# Altium PCB TOF.pcbdoc
Units mil, origin at the board's own origin, x right, y up, seen from the top; angles counter-clockwise.
Board outline 10852.5 x 10852.5 mil, 2 copper layers (Top Layer, Bottom Layer); 2 components, 64 nets, 66 pads, 0 vias.
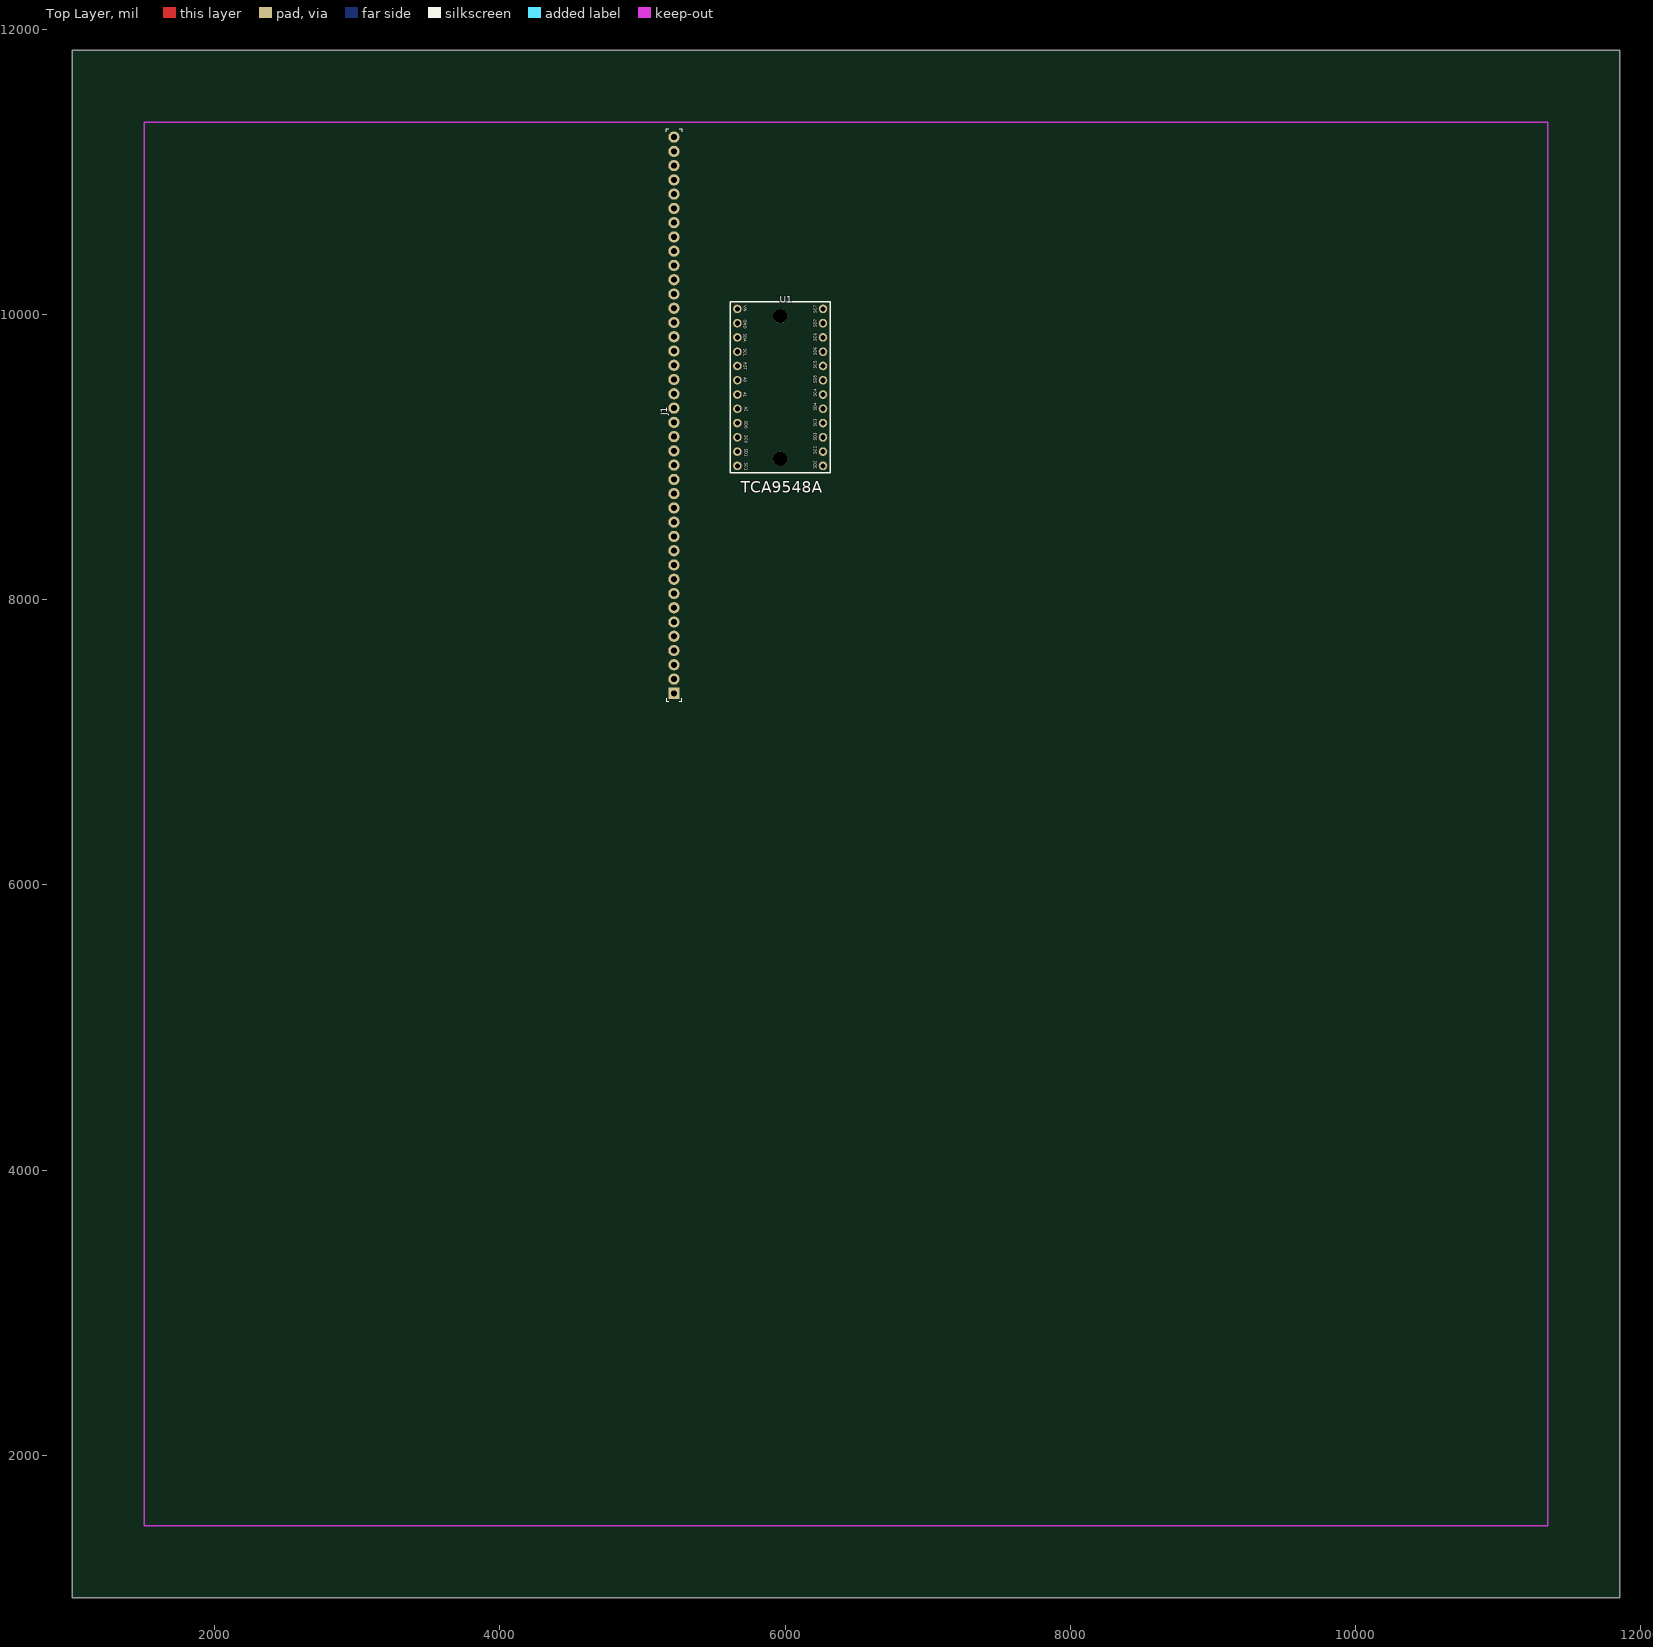
[diagram p0: Top Layer view]
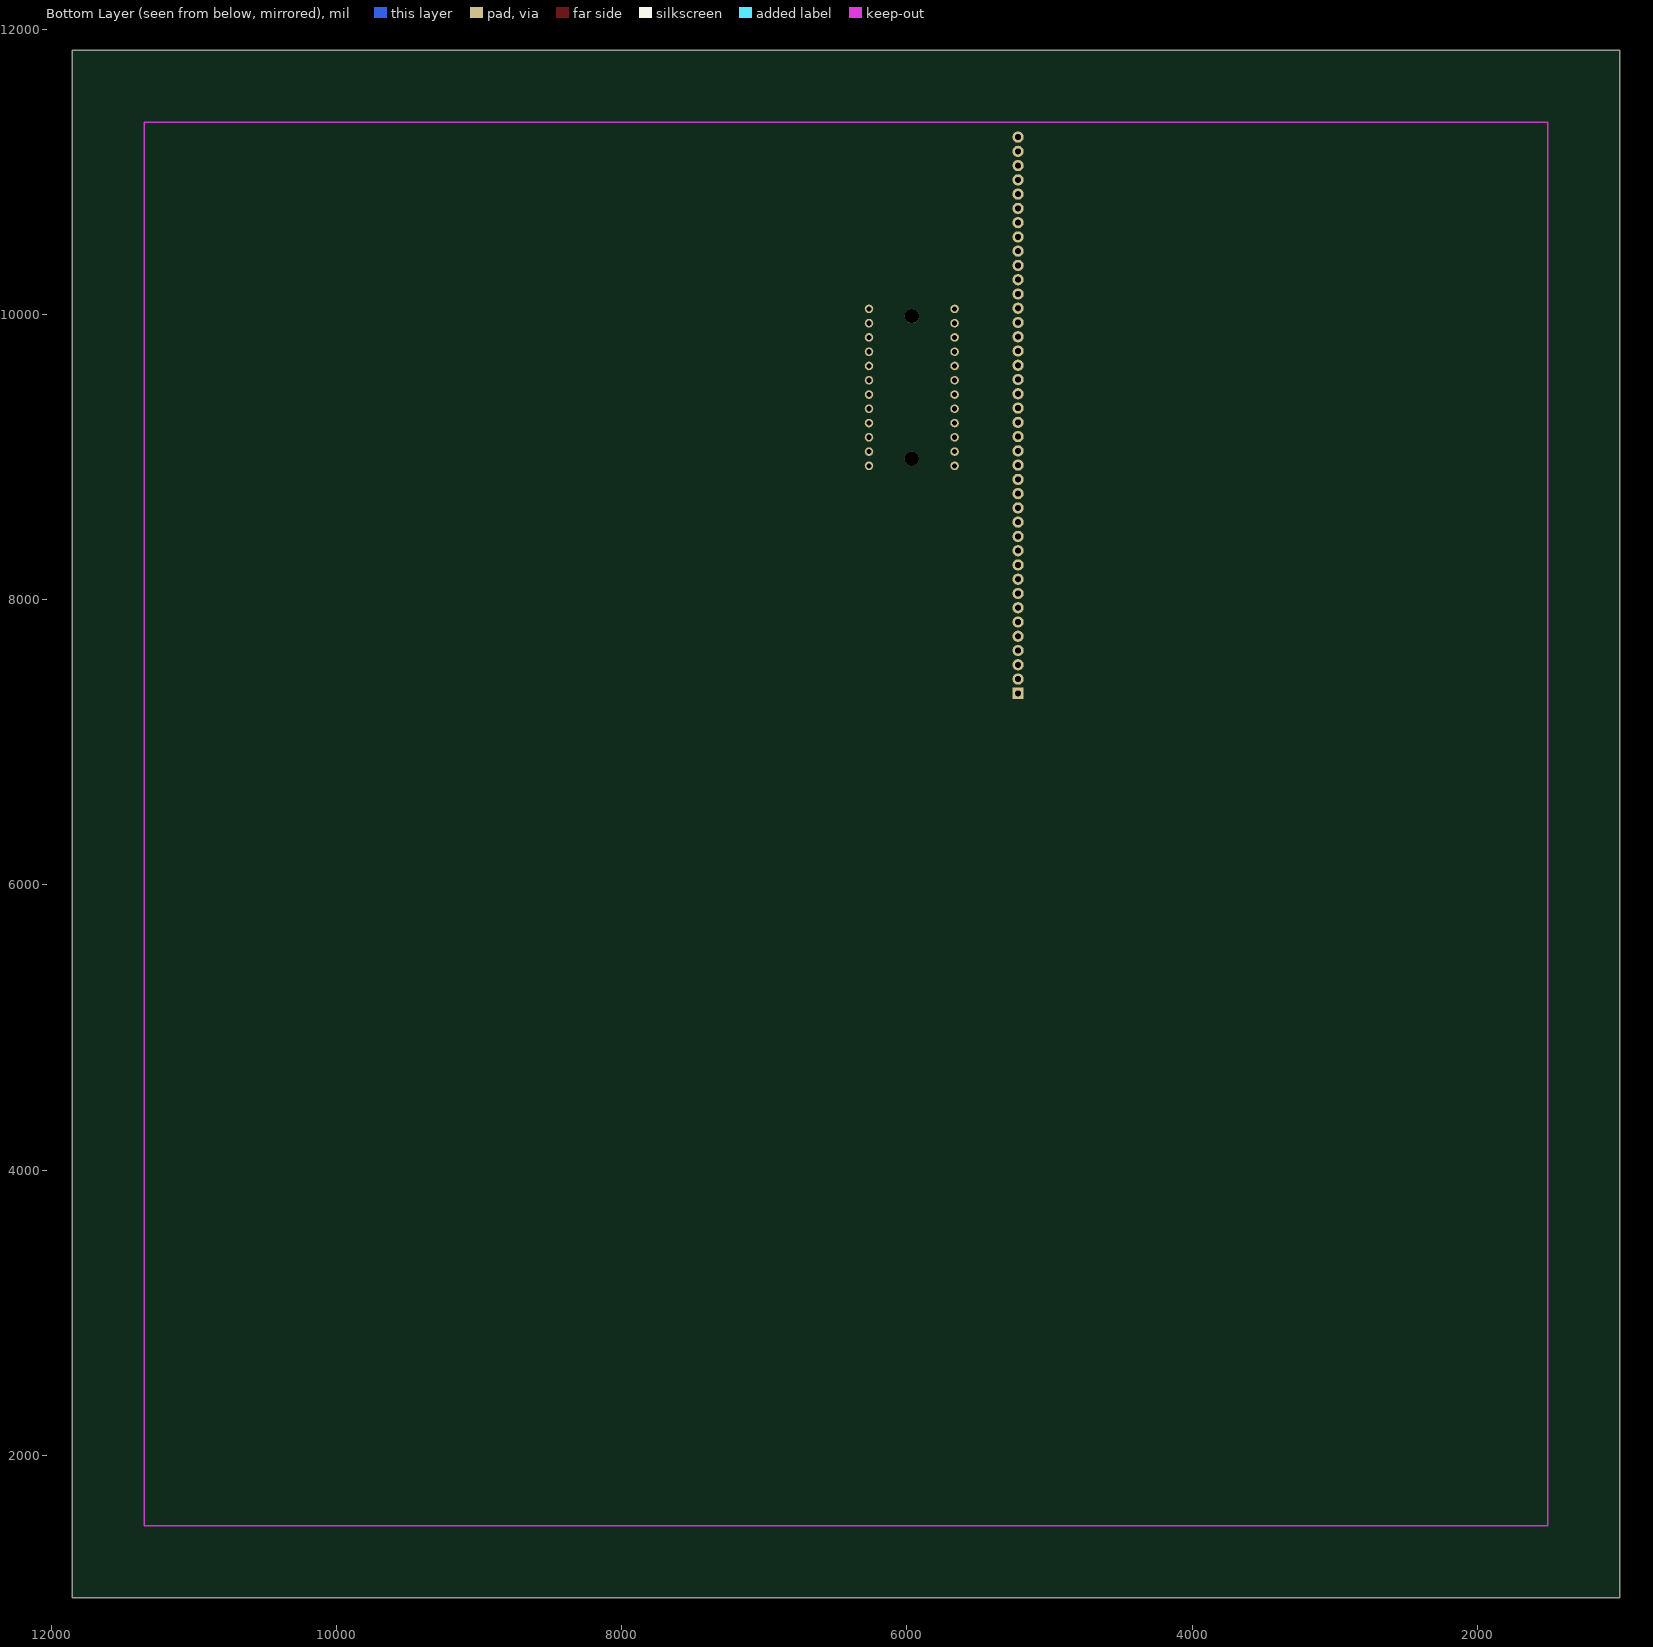
[diagram p1: Bottom Layer view, seen from below]

## Layer stack, top to bottom
Top Layer: signal copper (thickness not stored)
Dielectric: dielectric 12.6, FR-4, Dk 4.8
Bottom Layer: signal copper (thickness not stored)

## Board outline
11852.5,1000 1000,1000 1000,11852.5 11852.5,11852.5

## Components (designator, comment, footprint, x,y, rotation, side; value= is the part's Value field where it differs from the comment)
J1 "PRPC040SAAN-RC" PINHEADER_1X40_P2.54_DRILL1MM 5220,7342.5 r90 top
U1 "TCA9548A" TCA9548A 5965,9487.5 r0 top

## Footprints (in the part's own frame and the unit in brackets; to place one, negate y for a bottom-side part, rotate by r counter-clockwise, add the part's x,y. Pads: shape width x height; smd on the part's side, far side on the other; paste and mask are expansions set on the pad)
PINHEADER_1X40_P2.54_DRILL1MM [mm]
  rect 2x2 hole 1 paste+0 mask+0.051: 1(0,0)
  round 2 hole 1 paste+0 mask+0.051: 2(2.54,0) 3(5.08,0) 4(7.62,0) 5(10.16,0) 6(12.7,0) 7(15.24,0) 8(17.78,0) 9(20.32,0) 10(22.86,0) 11(25.4,0) 12(27.94,0) 13(30.48,0) 14(33.02,0) 15(35.56,0) 16(38.1,0) 17(40.64,0) 18(43.18,0) 19(45.72,0) 20(48.26,0) 21(50.8,0) 22(53.34,0) 23(55.88,0) 24(58.42,0) 25(60.96,0) 26(63.5,0) 27(66.04,0) 28(68.58,0) 29(71.12,0) 30(73.66,0) 31(76.2,0) 32(78.74,0) 33(81.28,0) 34(83.82,0) 35(86.36,0) 36(88.9,0) 37(91.44,0) 38(93.98,0) 39(96.52,0) 40(99.06,0)
  silkscreen extent -1.4,-1.4 100.5,1.4
TCA9548A [mil]
  round 60 hole 36 paste+0 mask+2: 1(-300,550) 2(-300,450) 3(-300,350) 4(-300,250) 5(-300,150) 6(-300,50) 7(-300,-50) 8(-300,-150) 9(-300,-250) 10(-300,-350) 11(-300,-450) 12(-300,-550) 13(300,-550) 14(300,-450) 15(300,-350) 16(300,-250) 17(300,-150) 18(300,-50) 19(300,50) 20(300,150) 21(300,250) 22(300,350) 23(300,450) 24(300,550)
  round 100 hole 100 unplated paste+0: ""(0,-500) ""(0,500)
  silkscreen extent -350,-600 350,600

## Nets (pads, with @x,y where several pads share a name; then routed paths per layer and width w, separated by ;. In a path a pad name is that pad's centre, name@x,y a point inside that pad or via, vN(x,y) a via of type N, cw(c..) or ccw(c..) an arc to the next point about the centre after c; other vN are vias at no path point)
J1_1: J1.1
J1_2: J1.2
J1_3: J1.3
J1_4: J1.4
J1_5: J1.5
J1_6: J1.6
J1_7: J1.7
J1_8: J1.8
J1_9: J1.9
J1_10: J1.10
J1_11: J1.11
J1_12: J1.12
J1_13: J1.13
J1_14: J1.14
J1_15: J1.15
J1_16: J1.16
J1_17: J1.17
J1_18: J1.18
J1_19: J1.19
J1_20: J1.20
J1_21: J1.21
J1_22: J1.22
J1_23: J1.23
J1_24: J1.24
J1_25: J1.25
J1_26: J1.26
J1_27: J1.27
J1_28: J1.28
J1_29: J1.29
J1_30: J1.30
J1_31: J1.31
J1_32: J1.32
J1_33: J1.33
J1_34: J1.34
J1_35: J1.35
J1_36: J1.36
J1_37: J1.37
J1_38: J1.38
J1_39: J1.39
J1_40: J1.40
U1_1: U1.1
U1_2: U1.2
U1_3: U1.3
U1_4: U1.4
U1_5: U1.5
U1_6: U1.6
U1_7: U1.7
U1_8: U1.8
U1_9: U1.9
U1_10: U1.10
U1_11: U1.11
U1_12: U1.12
U1_13: U1.13
U1_14: U1.14
U1_15: U1.15
U1_16: U1.16
U1_17: U1.17
U1_18: U1.18
U1_19: U1.19
U1_20: U1.20
U1_21: U1.21
U1_22: U1.22
U1_23: U1.23
U1_24: U1.24
pads on no net: U1.

## Text inside footprints (layer, text, board x,y; h text height)
U1: Top Overlay "VIN" at 5708.2,10062.5 h20 r270; Top Overlay "GND" at 5708.2,9962.5 h20 r270; Top Overlay "SDA" at 5710,9862.5 h20 r270; Top Overlay "SCL" at 5710,9757.5 h20 r270; Top Overlay "RST" at 5710,9662.5 h20 r270; Top Overlay "A0" at 5710,9557.5 h20 r270; Top Overlay "A1" at 5710,9452.5 h20 r270; Top Overlay "A2" at 5715,9352.5 h20 r270; Top Overlay "SD0" at 5715,9252.5 h20 r270; Top Overlay "SC0" at 5715,9152.5 h20 r270; Top Overlay "SD1" at 5715,9057.5 h20 r270; Top Overlay "SC1" at 5715,8957.5 h20 r270; Top Overlay "SC3" at 6220,9212.5 h20 r90; Top Overlay "SD2" at 6220,8917.5 h20 r90; Top Overlay "SC2" at 6220,9017.5 h20 r90; Top Overlay "SD3" at 6220,9112.5 h20 r90; Top Overlay "SC5" at 6220,9617.5 h20 r90; Top Overlay "SD5" at 6220,9517.5 h20 r90; Top Overlay "SC4" at 6220,9422.5 h20 r90; Top Overlay "SD4" at 6220,9322.5 h20 r90; Top Overlay "SC7" at 6220,10007.5 h20 r90; Top Overlay "SD7" at 6220,9907.5 h20 r90; Top Overlay "SC6" at 6220,9812.5 h20 r90; Top Overlay "SD6" at 6220,9712.5 h20 r90